# EAGLE board power-new (EAGLE 6.2)
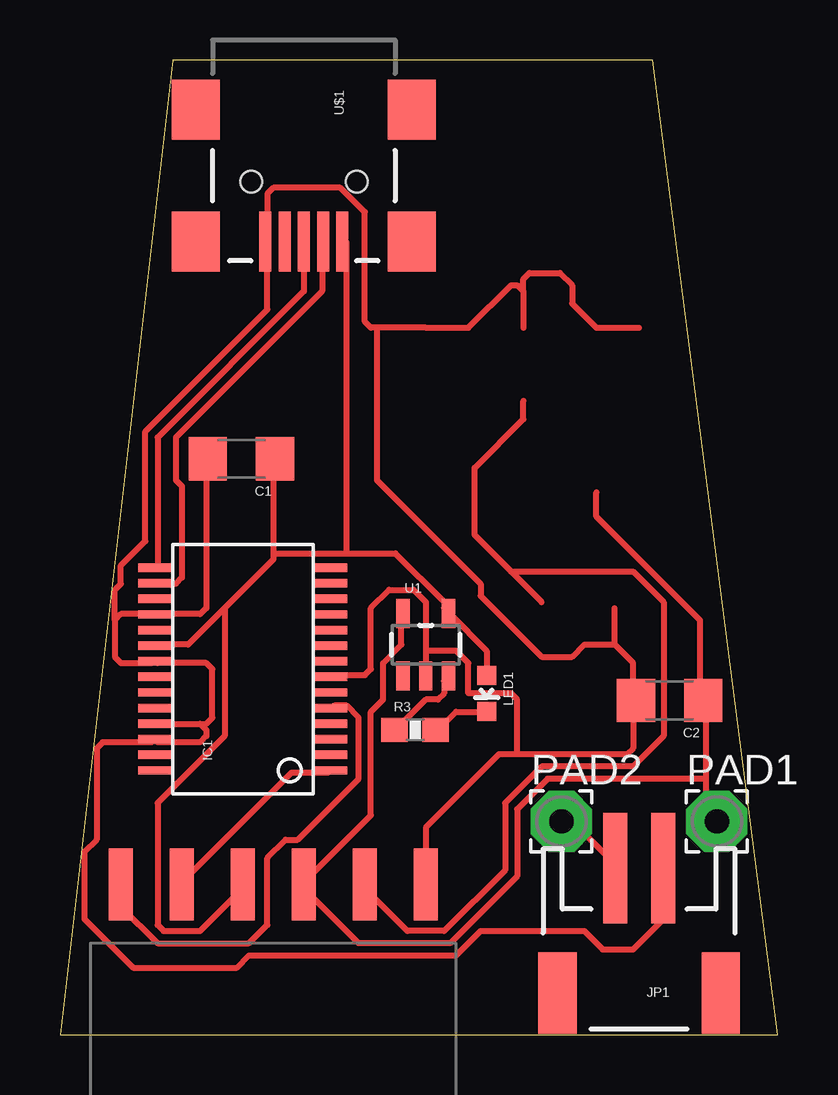
[diagram p0: board, top side]

Size 29.9 x 40.63 mm. Coordinates in mm from the lower left corner, seen from the top.
Outline: 0,0 29.9,0 24.69,40.63 4.7,40.63 0,0
Copper layers (1*16): Top 0.035mm / dielectric 1.5mm / Bottom 0.035mm
Design rules: minimum track width 10mil, minimum drill 24mil, track to track 8mil, track to pad 8mil, pad to pad 8mil, via to via 8mil, smd to smd 8mil, copper to edge 0mil, drill to drill 8mil, minimum pad ring 10mil, minimum via ring 8mil, stop-mask expansion 4mil, vias tented up to drill 0mil, thermal gap 10mil

## Footprints (pad centres in the part's own frame; a part is rotated, then mirrored left to right if it is on the bottom)
1206 = smd 1.6 x 1.8: 1 -1.4,0; 2 1.4,0
SSOP28DB = smd 0.348 x 1.397: 1 -4.225,-3.656; 2 -3.575,-3.656; 3 -2.925,-3.656; 4 -2.275,-3.656; 5 -1.625,-3.656; 6 -0.975,-3.656; 7 -0.325,-3.656; 8 0.325,-3.656; 9 0.975,-3.656; 10 1.625,-3.656; 11 2.275,-3.656; 12 2.925,-3.656; 13 3.575,-3.656; 14 4.225,-3.656; 15 4.225,3.656; 16 3.575,3.656; 17 2.925,3.656; 18 2.275,3.656; 19 1.625,3.656; 20 0.975,3.656; 21 0.325,3.656; 22 -0.325,3.656; 23 -0.975,3.656; 24 -1.625,3.656; 25 -2.275,3.656; 26 -2.925,3.656; 27 -3.575,3.656; 28 -4.225,3.656
JST-2-SMD = smd 1 x 4.6: 1 -1,-3.7; 2 1,-3.7 | smd 1.6 x 3.4: NC1 -3.4,1.5; NC2 3.4,1.5
1X06-SMD_EDGE = smd 1 x 3: 1 0,-0.08; 2 2.54,-0.08; 3 5.08,-0.08; 4 7.62,-0.08; 5 10.16,-0.08; 6 12.7,-0.08
LED-0603 = smd 0.8 x 0.8: A 0,-0.75; C 0,0.75
2,54/1,0 = drill 1.016 pad 2.54 octagon: 1 0,0
0603-RES = smd 1.1 x 1: 1 -0.85,0; 2 0.85,0
SOT23-5 = smd 0.55 x 1.2: 1 -0.95,-1.3; 2 0,-1.3; 3 0.95,-1.3; 4 0.95,1.3; 5 -0.95,1.3
USB-MINIB = smd 2.5 x 0.5: D+ 2.5,0; D- 2.5,0.8; GND 2.5,-1.6; ID 2.5,-0.8; VBUS 2.5,1.6 | smd 2.5 x 2: MTN1 -3,4.5; MTN2 2.5,4.5; MTN3 -3,-4.5; MTN4 2.5,-4.5 | hole 0.9: 0,2.2; 0,-2.2
SOT23-5' = smd 0.7 x 1: 1 0.95,1.2; 2 0,1.2; 3 -0.95,1.2; 4 -1,-1.2; 5 1,-1.2

## Placement (x,y rotation side)
C1  4.7uF  [1206]  7.56,24 180 top
C2  4.7uF  [1206]  25.4,13.93 180 top
IC1  FT232RLSSOP  [SSOP28DB]  7.62,15.24 90 top
JP1  Battery  [JST-2-SMD]  24.13,3.24 180 top
JP3  [1X06-SMD_EDGE]  2.54,6.35 0 top
LED1  [LED-0603]  17.78,14.22 180 top
PAD1  [2,54/1,0]  27.37,8.89 0 top
PAD2  [2,54/1,0]  20.89,8.89 0 top
R3  [0603-RES]  14.8,12.7 0 top
U1  MAX1555  [SOT23-5]  15.24,16.26 0 top
U$1  USB-MINIB-5PIN  [USB-MINIB]  10.16,35.56 270 top
U$2  SP6641SP6641A/B  [SOT23-5']  5.08,-8.89 0 top  (outside the outline)

## Library data of the parts
C1 C2 IC1 JP1 JP3 LED1 R3 U1 U$1 = SparkFun
PAD1 PAD2 = wirepad
U$2 = Sipex Custom

## Nets
D+: IC1.15 U$1.D+
D-: IC1.16 U$1.D-
GND: C1.2 C2.2 IC1.7 IC1.18 IC1.21 IC1.25 IC1.26 JP1.1 JP3.6 U1.2 U$1.GND
N$1: JP1.2 PAD2.1
N$2: LED1.C R3.2
N$4: R3.1 U1.3
RX: IC1.5 JP3.1
TX: IC1.1 JP3.2
VBATT: C2.1 JP3.4 PAD1.1 U1.5
VBOOST: JP3.5
VBUS: C1.1 IC1.20 JP3.3 LED1.A U1.4 U$1.VBUS
VCCIO: IC1.4

## Tracks (layer width: path | path; a pad name or v marks a point on that pad's centre or on a via)
D+
  Top 0.254: U$1.D+ 10.16,30.99 4.06,24.89 4.06,19.56 IC1.15
D-
  Top 0.254: IC1.16 4.06,18.8 4.83,18.8 5.08,19.05 5.08,22.86 4.83,23.11 4.83,24.89 10.92,30.99 10.92,33.02 U$1.D-
GND
  Top 0.254: 15.24,16 15.24,18.03 14.73,18.54 13.72,18.54 12.95,17.78 12.95,15.24 12.7,14.99 11.43,14.99 IC1.7 | 15.24,16 U1.2 | 23.11,16.26 23.11,17.78 | 23.11,16.26 23.88,15.49 23.88,13.97 C2.2 23.88,13.72 23.88,11.94 23.62,11.68 19.05,11.68 | JP3.6 15.24,8.64 18.29,11.68 19.05,11.68 | 15.24,16 16.51,16 17.02,15.49 17.02,14.22 18.8,14.22 19.05,13.97 19.05,11.68 | 19.3,30.99 19.3,29.46 | 19.3,30.99 19.05,31.24 18.8,31.24 17.02,29.46 15.24,29.46 13.21,29.46 | 24.13,29.46 22.35,29.46 21.34,30.48 21.34,31.24 20.83,31.75 19.56,31.75 19.3,31.5 19.3,30.99 | 13.21,29.46 12.95,29.46 12.7,29.72 12.7,34.29 11.68,35.31 8.89,35.31 8.64,35.05 8.64,33.27 U$1.GND 8.64,33.02 8.64,30.23 3.56,25.15 3.56,20.57 2.54,19.56 2.54,18.8 2.29,18.54 2.29,17.27 | 5.84,12.95 6.1,12.7 6.1,12.45 5.84,12.19 4.06,12.19 IC1.26 3.81,12.19 1.78,12.19 1.52,11.94 1.52,8.13 1.02,7.62 1.02,4.83 3.05,2.79 7.37,2.79 7.87,3.3 16.51,3.3 17.53,4.32 21.84,4.32 22.61,3.56 23.88,3.56 25.15,4.83 25.15,6.86 JP1.1 | 5.84,12.95 4.06,12.95 IC1.25 | 5.84,12.95 6.1,12.95 6.35,13.21 6.35,15.24 6.1,15.49 4.06,15.49 IC1.21 3.81,15.49 2.54,15.49 2.29,15.75 2.29,17.27 | C1.2 6.1,23.88 6.1,17.78 5.84,17.53 4.06,17.53 IC1.18 3.81,17.53 2.54,17.53 2.29,17.27 | 23.11,16.26 21.84,16.26 21.34,15.75 20.07,15.75 17.53,18.29 17.53,18.8 13.21,23.11 13.21,29.46
N$1
  Top 0.254: PAD2.1 21.34,8.89 23.11,7.11 JP1.2
N$2
  Top 0.254: LED1.C 16.51,13.46 15.75,12.7 R3.2
N$4
  Top 0.254: R3.1 13.97,12.7 15.24,13.97 15.75,13.97 16,14.22 16,14.73 U1.3
RX
  Top 0.254: JP3.1 2.54,5.33 4.06,3.81 7.87,3.81 8.64,4.57 8.64,7.37 9.4,8.13 9.91,8.13 12.45,10.67 12.45,13.21 11.94,13.72 11.43,13.72 IC1.5
TX
  Top 0.254: IC1.1 11.18,10.92 9.65,10.92 5.08,6.35 JP3.2
VBATT
  Top 0.254: U1.5 14.22,17.53 14.22,16.26 13.46,15.49 13.46,13.97 12.95,13.46 12.95,9.14 10.16,6.35 JP3.4 10.16,6.1 12.45,3.81 16.26,3.81 19.05,6.6 19.05,9.4 20.32,10.67 26.92,10.67 | 26.92,10.67 26.92,9.14 27.18,8.89 PAD1.1 | 26.92,10.67 26.92,13.72 C2.1 26.67,13.97 26.67,17.27 22.35,21.59 22.35,22.61
VBOOST
  Top 0.254: 19.3,26.42 19.3,25.65 17.27,23.62 17.27,20.83 18.8,19.3 | 20.07,18.03 18.8,19.3 | 18.8,19.3 23.88,19.3 25.15,18.03 25.15,12.45 23.88,11.18 20.07,11.18 18.54,9.65 18.54,6.86 16,4.32 14.48,4.32 12.7,6.1 JP3.5
VBUS
  Top 0.254: LED1.A 17.78,16 16.26,17.53 U1.4 16,17.78 16,18.03 13.97,20.07 11.94,20.07 | 6.86,17.78 8.89,19.81 8.89,20.07 | 6.86,17.78 5.33,16.26 4.06,16.26 IC1.20 | 8.89,20.07 8.89,23.88 C1.1 | 8.89,20.07 11.94,20.07 | 11.94,20.07 11.94,33.02 U$1.VBUS | 6.86,17.78 6.86,12.45 4.06,9.65 4.06,4.57 4.32,4.32 5.84,4.32 7.62,6.1 JP3.3